# Altium PCB bot_top_4.PcbDoc
Units mil, origin at the board's own origin, x right, y up, seen from the top; angles counter-clockwise.
Board outline 1710 x 2020 mil, 2 copper layers (Top Layer, Bottom Layer); 118 components, 46 nets, 248 pads, 126 vias.
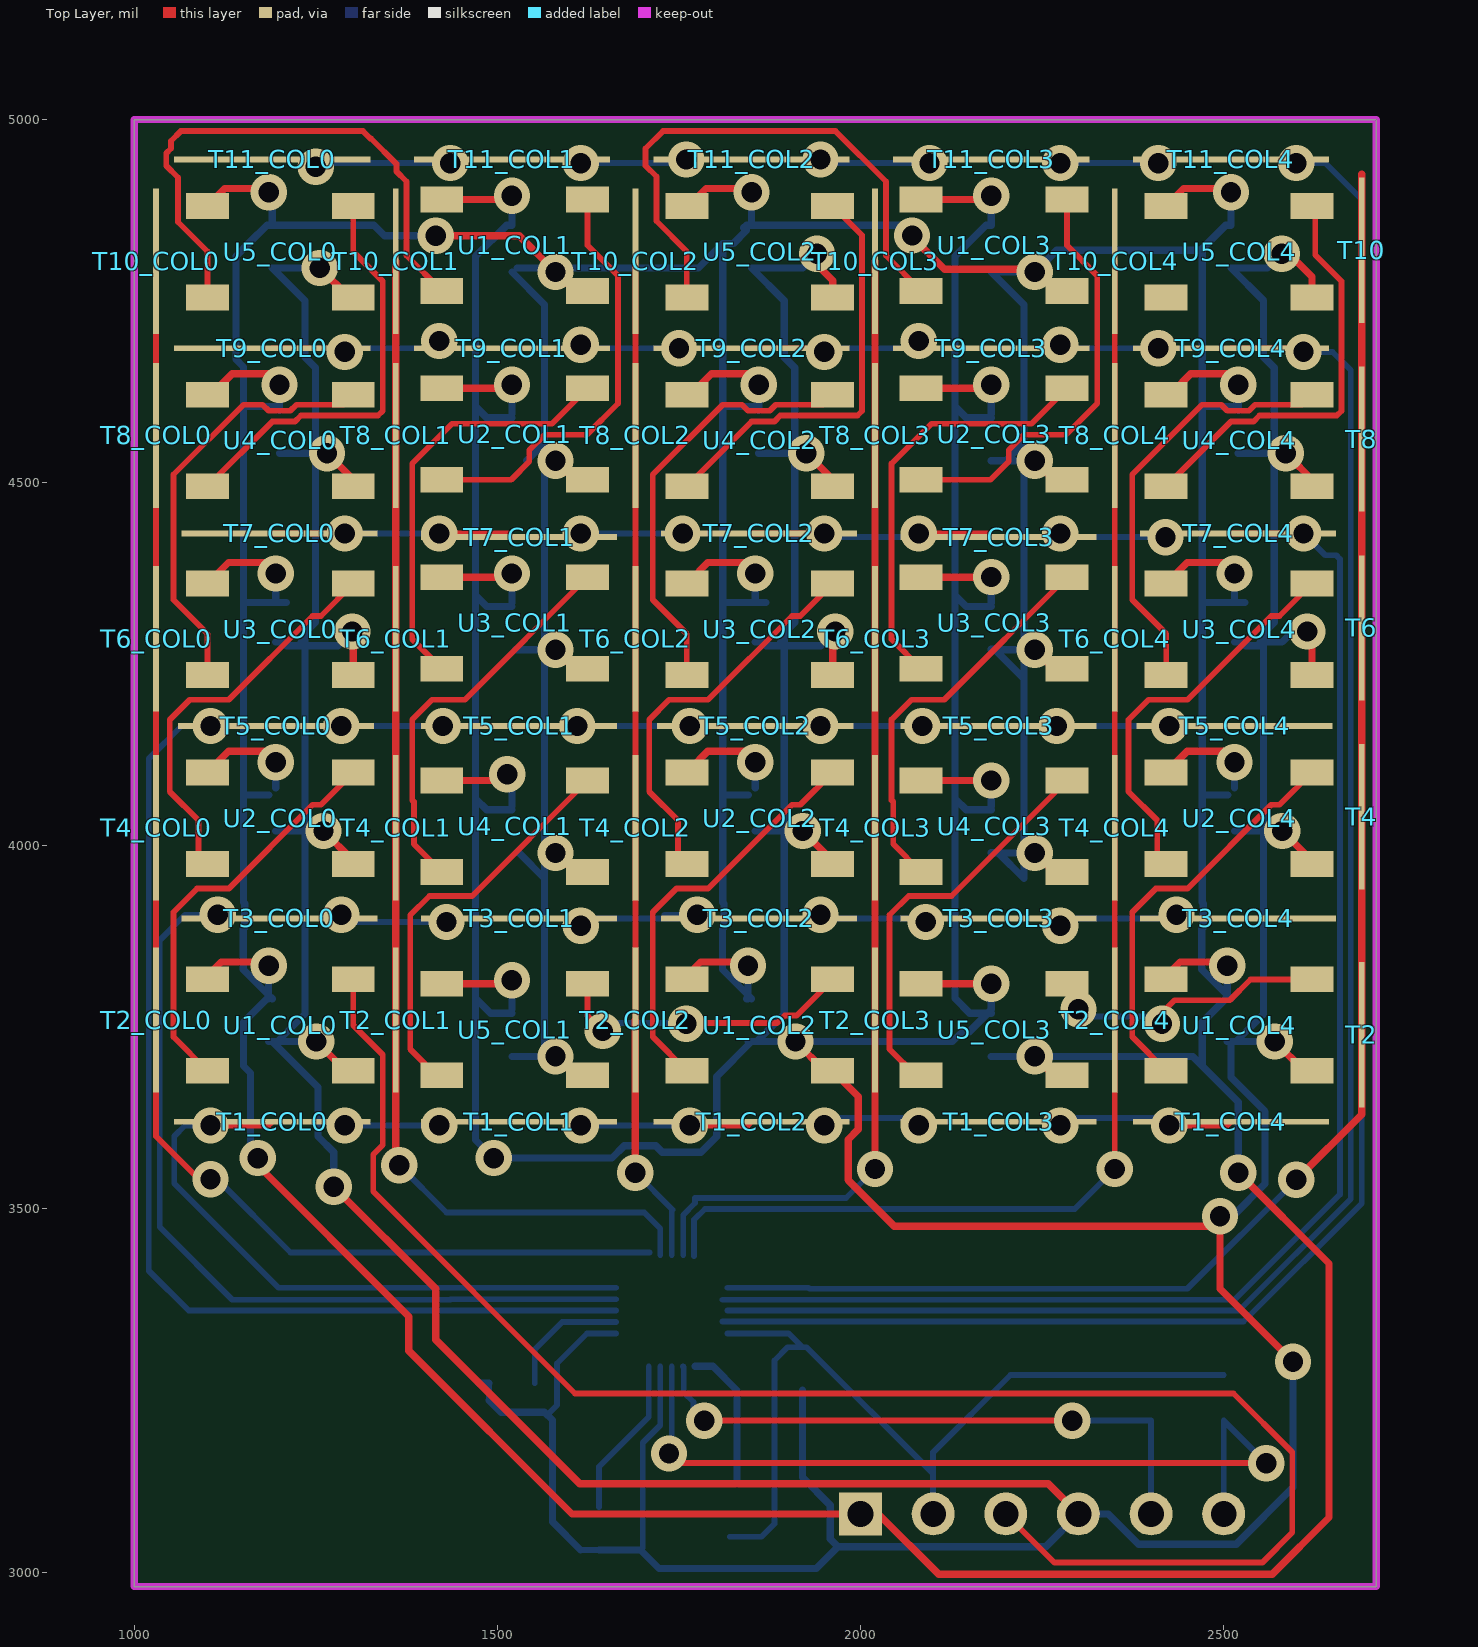
[diagram p0: Top Layer view]
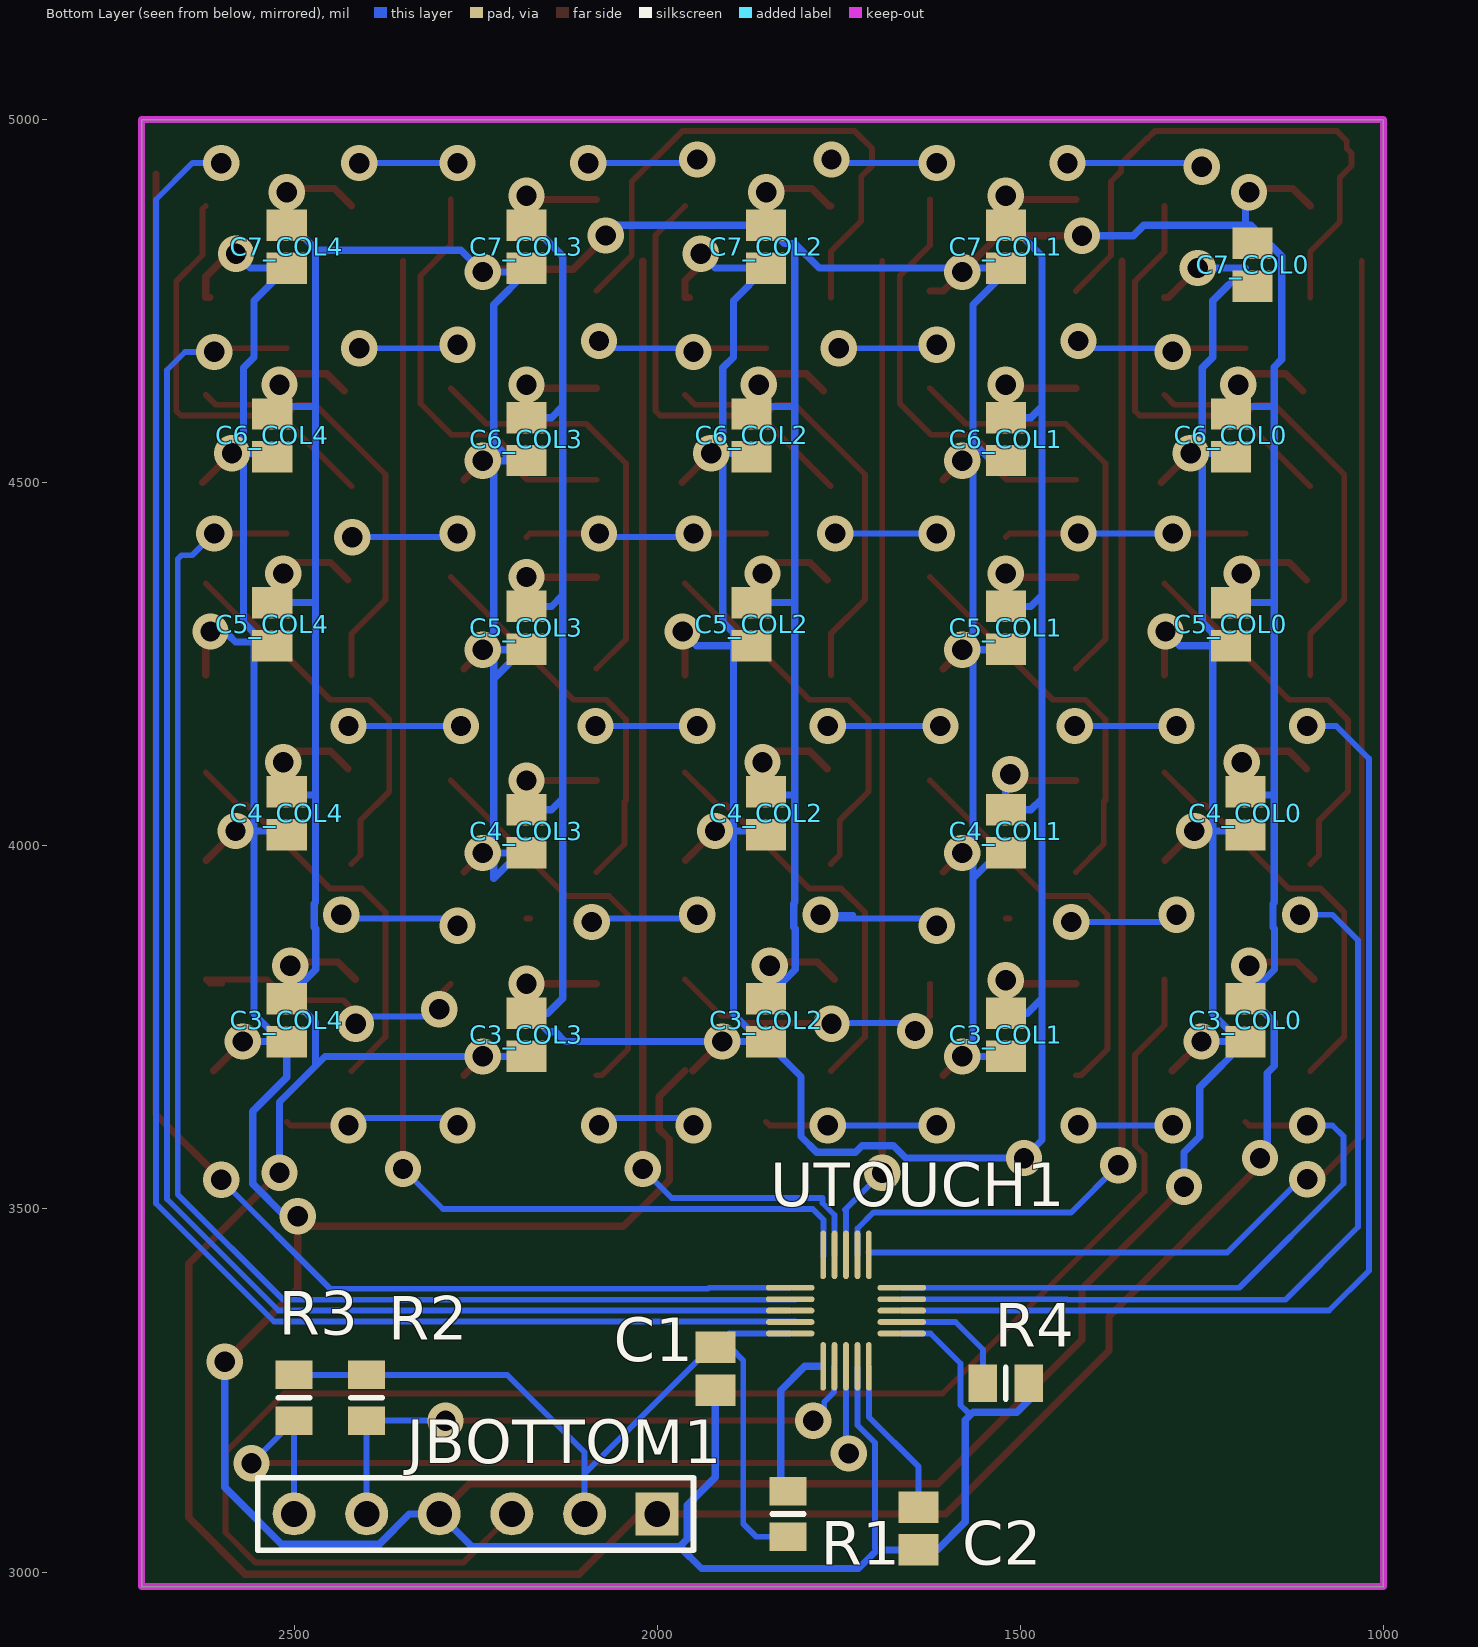
[diagram p1: Bottom Layer view, seen from below]

## Layer stack, top to bottom
Top Layer: signal copper 1.4
Dielectric: dielectric 12.6, FR-4, Dk 4.8
Bottom Layer: signal copper 1.4

## Board outline
2710,2980 1000,2980 1000,5000 2710,5000

## Design rules (kind name [scope] priority, off if disabled: settings)
Clearance [All] p1: gap=7
MinimumSolderMaskSliver [All] p1: minsoldermaskwidth=7
PolygonConnect [All] p1: connectstyle=Relief reliefconductorwidth=10 reliefentries=4 polygonreliefangle="90 Angle"
RoomDefinition COL4 [InComponentClass('COL4')] p1: confinementstyle=ConfineIn formatcopy=TRUE lockcomponents=FALSE outline 2335,3575 2665,3575 2665,5000 2335,5000
RoomDefinition COL3 [InComponentClass('COL3')] p2: confinementstyle=ConfineIn formatcopy=TRUE lockcomponents=FALSE outline 2005,3575 2335,3575 2335,5000 2005,5000
RoomDefinition COL2 [InComponentClass('COL2')] p3: confinementstyle=ConfineIn formatcopy=TRUE lockcomponents=FALSE outline 1675,3575 2005,3575 2005,5000 1675,5000
RoomDefinition COL1 [InComponentClass('COL1')] p4: confinementstyle=ConfineIn formatcopy=TRUE lockcomponents=FALSE outline 1345,3575 1675,3575 1675,5000 1345,5000
RoomDefinition COL0 [InComponentClass('COL0')] p5: confinementstyle=ConfineIn formatcopy=TRUE lockcomponents=FALSE outline 1015,3575 1345,3575 1345,5000 1015,5000
RoutingVias [All] p1: holewidth=28 width=50 viastyle="Through Hole" minholewidth=28 minwidth=50 maxholewidth=28 maxwidth=50
SMDNeckDown [All] p1: percent=200.000
SilkToSilkClearance [All] p1: silktosilkclearance=7
SilkscreenOverComponentPads [All] p1: minsilkscreentomaskgap=7
SolderMaskExpansion [All] p1: expansion=4
Width [All] p1: maxlimit=10 minlimit=7 preferedwidth=8
25 further rules are at their usual default settings.

## Classes and differential pairs
component class BOT-TOP: C1 C2 JBOTTOM1 R1 R2 R3 R4 T2 T4 T6 T8 T10 UTOUCH1
component class COL0: C3_COL0 C4_COL0 C5_COL0 C6_COL0 C7_COL0 T1_COL0 T2_COL0 T3_COL0 T4_COL0 T5_COL0 T6_COL0 T7_COL0 T8_COL0 T9_COL0 T10_COL0 T11_COL0 U1_COL0 U2_COL0 U3_COL0 U4_COL0 U5_COL0
component class COL1: C3_COL1 C4_COL1 C5_COL1 C6_COL1 C7_COL1 T1_COL1 T2_COL1 T3_COL1 T4_COL1 T5_COL1 T6_COL1 T7_COL1 T8_COL1 T9_COL1 T10_COL1 T11_COL1 U1_COL1 U2_COL1 U3_COL1 U4_COL1 U5_COL1
component class COL2: C3_COL2 C4_COL2 C5_COL2 C6_COL2 C7_COL2 T1_COL2 T2_COL2 T3_COL2 T4_COL2 T5_COL2 T6_COL2 T7_COL2 T8_COL2 T9_COL2 T10_COL2 T11_COL2 U1_COL2 U2_COL2 U3_COL2 U4_COL2 U5_COL2
component class COL3: C3_COL3 C4_COL3 C5_COL3 C6_COL3 C7_COL3 T1_COL3 T2_COL3 T3_COL3 T4_COL3 T5_COL3 T6_COL3 T7_COL3 T8_COL3 T9_COL3 T10_COL3 T11_COL3 U1_COL3 U2_COL3 U3_COL3 U4_COL3 U5_COL3
component class COL4: C3_COL4 C4_COL4 C5_COL4 C6_COL4 C7_COL4 T1_COL4 T2_COL4 T3_COL4 T4_COL4 T5_COL4 T6_COL4 T7_COL4 T8_COL4 T9_COL4 T10_COL4 T11_COL4 U1_COL4 U2_COL4 U3_COL4 U4_COL4 U5_COL4
net class T_COL[1..6]: T_COL1 T_COL2 T_COL3 T_COL4 T_COL5 T_COL6
net class T_ROW[1..6]: T_ROW1 T_ROW2 T_ROW3 T_ROW4 T_ROW5 T_ROW6
channel class led_column: COL0 COL1 COL2 COL3 COL4

## Components (designator, comment, footprint, x,y, rotation, side; value= is the part's Value field where it differs from the comment)
C1 "" CAPC2012L 1920,3280 r90 bottom
C2 "" CAPC2012L 1640,3060 r90 bottom
C3_COL0 "" CAPC2012L 1190,3760 r270 bottom (schematic designator C3)
C3_COL1 "" CAPC2012L 1520,3740 r90 bottom (schematic designator C3)
C3_COL2 "" CAPC2012L 1850,3760 r270 bottom (schematic designator C3)
C3_COL3 "" CAPC2012L 2180,3740 r90 bottom (schematic designator C3)
C3_COL4 "" CAPC2012L 2510,3760 r270 bottom (schematic designator C3)
C4_COL0 "" CAPC2012L 1190,4045 r270 bottom (schematic designator C4)
C4_COL1 "" CAPC2012L 1520,4020 r90 bottom (schematic designator C4)
C4_COL2 "" CAPC2012L 1850,4045 r270 bottom (schematic designator C4)
C4_COL3 "" CAPC2012L 2180,4020 r90 bottom (schematic designator C4)
C4_COL4 "" CAPC2012L 2510,4045 r270 bottom (schematic designator C4)
C5_COL0 "" CAPC2012L 1210,4305 r270 bottom (schematic designator C5)
C5_COL1 "" CAPC2012L 1520,4300 r90 bottom (schematic designator C5)
C5_COL2 "" CAPC2012L 1870,4305 r270 bottom (schematic designator C5)
C5_COL3 "" CAPC2012L 2180,4300 r90 bottom (schematic designator C5)
C5_COL4 "" CAPC2012L 2530,4305 r270 bottom (schematic designator C5)
C6_COL0 "" CAPC2012L 1210,4565 r270 bottom (schematic designator C6)
C6_COL1 "" CAPC2012L 1520,4560 r90 bottom (schematic designator C6)
C6_COL2 "" CAPC2012L 1870,4565 r270 bottom (schematic designator C6)
C6_COL3 "" CAPC2012L 2180,4560 r90 bottom (schematic designator C6)
C6_COL4 "" CAPC2012L 2530,4565 r270 bottom (schematic designator C6)
C7_COL0 "" CAPC2012L 1180,4800 r270 bottom (schematic designator C7)
C7_COL1 "" CAPC2012L 1520,4825 r90 bottom (schematic designator C7)
C7_COL2 "" CAPC2012L 1850,4825 r270 bottom (schematic designator C7)
C7_COL3 "" CAPC2012L 2180,4825 r90 bottom (schematic designator C7)
C7_COL4 "" CAPC2012L 2510,4825 r270 bottom (schematic designator C7)
JBOTTOM1 "" HDR1X6 2000,3080 r0 bottom
R1 "" RESC2012L 1820,3080 r90 bottom
R2 "" RESC2012L 2400,3240 r270 bottom
R3 "" RESC2012L 2500,3240 r270 bottom
R4 "" RESC2012L 1520,3260 r0 bottom
T1_COL0 "TouchStrip_Horiz" TouchStrip_Horiz#1 1190,3620 r180 top (schematic designator T1)
T1_COL1 "TouchStrip_Horiz" TouchStrip_Horiz#2 1520,3620 r180 top (schematic designator T1)
T1_COL2 "TouchStrip_Horiz" TouchStrip_Horiz#1 1850,3620 r180 top (schematic designator T1)
T1_COL3 "TouchStrip_Horiz" TouchStrip_Horiz#1 2190,3620 r180 top (schematic designator T1)
T1_COL4 "TouchStrip_Horiz" TouchStrip_Horiz#1 2510,3620 r180 top (schematic designator T1)
T2 "TouchStrip_Vert" TouchStrip_Vert#1 2690,3740 r0 top
T2_COL0 "TouchStrip_Vert" TouchStrip_Vert#1 1030,3760 r180 top (schematic designator T2)
T2_COL1 "TouchStrip_Vert" TouchStrip_Vert#1 1360,3760 r180 top (schematic designator T2)
T2_COL2 "TouchStrip_Vert" TouchStrip_Vert#1 1690,3760 r180 top (schematic designator T2)
T2_COL3 "TouchStrip_Vert" TouchStrip_Vert#1 2020,3760 r180 top (schematic designator T2)
T2_COL4 "TouchStrip_Vert" TouchStrip_Vert#1 2350,3760 r180 top (schematic designator T2)
T3_COL0 "TouchStrip_Horiz" TouchStrip_Horiz#1 1200,3900 r180 top (schematic designator T3)
T3_COL1 "TouchStrip_Horiz" TouchStrip_Horiz#2 1520,3900 r180 top (schematic designator T3)
T3_COL2 "TouchStrip_Horiz" TouchStrip_Horiz#1 1860,3900 r180 top (schematic designator T3)
T3_COL3 "TouchStrip_Horiz" TouchStrip_Horiz#1 2190,3900 r180 top (schematic designator T3)
T3_COL4 "TouchStrip_Horiz" TouchStrip_Horiz#1 2520,3900 r180 top (schematic designator T3)
T4 "TouchStrip_Vert" TouchStrip_Vert#1 2690,4040 r0 top
T4_COL0 "TouchStrip_Vert" TouchStrip_Vert#1 1030,4025 r180 top (schematic designator T4)
T4_COL1 "TouchStrip_Vert" TouchStrip_Vert#1 1360,4025 r180 top (schematic designator T4)
T4_COL2 "TouchStrip_Vert" TouchStrip_Vert#1 1690,4025 r180 top (schematic designator T4)
T4_COL3 "TouchStrip_Vert" TouchStrip_Vert#1 2020,4025 r180 top (schematic designator T4)
T4_COL4 "TouchStrip_Vert" TouchStrip_Vert#1 2350,4025 r180 top (schematic designator T4)
T5_COL0 "TouchStrip_Horiz" TouchStrip_Horiz#1 1195,4165 r180 top (schematic designator T5)
T5_COL1 "TouchStrip_Horiz" TouchStrip_Horiz#2 1520,4165 r180 top (schematic designator T5)
T5_COL2 "TouchStrip_Horiz" TouchStrip_Horiz#1 1855,4165 r180 top (schematic designator T5)
T5_COL3 "TouchStrip_Horiz" TouchStrip_Horiz#1 2190,4165 r180 top (schematic designator T5)
T5_COL4 "TouchStrip_Horiz" TouchStrip_Horiz#1 2515,4165 r180 top (schematic designator T5)
T6 "TouchStrip_Vert" TouchStrip_Vert#1 2690,4300 r0 top
T6_COL0 "TouchStrip_Vert" TouchStrip_Vert#1 1030,4285 r180 top (schematic designator T6)
T6_COL1 "TouchStrip_Vert" TouchStrip_Vert#1 1360,4285 r180 top (schematic designator T6)
T6_COL2 "TouchStrip_Vert" TouchStrip_Vert#1 1690,4285 r180 top (schematic designator T6)
T6_COL3 "TouchStrip_Vert" TouchStrip_Vert#1 2020,4285 r180 top (schematic designator T6)
T6_COL4 "TouchStrip_Vert" TouchStrip_Vert#1 2350,4285 r180 top (schematic designator T6)
T7_COL0 "TouchStrip_Horiz" TouchStrip_Horiz#3 1200,4430 r90 top (schematic designator T7)
T7_COL1 "TouchStrip_Horiz" TouchStrip_Horiz#4 1520,4425 r90 top (schematic designator T7)
T7_COL2 "TouchStrip_Horiz" TouchStrip_Horiz#3 1860,4430 r90 top (schematic designator T7)
T7_COL3 "TouchStrip_Horiz" TouchStrip_Horiz#3 2190,4425 r90 top (schematic designator T7)
T7_COL4 "TouchStrip_Horiz" TouchStrip_Horiz#3 2520,4430 r90 top (schematic designator T7)
T8 "TouchStrip_Vert" TouchStrip_Vert#1 2690,4560 r0 top
T8_COL0 "TouchStrip_Vert" TouchStrip_Vert#2 1030,4565 r90 top (schematic designator T8)
T8_COL1 "TouchStrip_Vert" TouchStrip_Vert#2 1360,4565 r90 top (schematic designator T8)
T8_COL2 "TouchStrip_Vert" TouchStrip_Vert#2 1690,4565 r90 top (schematic designator T8)
T8_COL3 "TouchStrip_Vert" TouchStrip_Vert#2 2020,4565 r90 top (schematic designator T8)
T8_COL4 "TouchStrip_Vert" TouchStrip_Vert#2 2350,4565 r90 top (schematic designator T8)
T9_COL0 "TouchStrip_Horiz" TouchStrip_Horiz#3 1190,4685 r90 top (schematic designator T9)
T9_COL1 "TouchStrip_Horiz" TouchStrip_Horiz#3 1520,4685 r90 top (schematic designator T9)
T9_COL2 "TouchStrip_Horiz" TouchStrip_Horiz#3 1850,4685 r90 top (schematic designator T9)
T9_COL3 "TouchStrip_Horiz" TouchStrip_Horiz#3 2180,4685 r90 top (schematic designator T9)
T9_COL4 "TouchStrip_Horiz" TouchStrip_Horiz#3 2510,4685 r90 top (schematic designator T9)
T10 "TouchStrip_Vert" TouchStrip_Vert#1 2690,4820 r0 top
T10_COL0 "TouchStrip_Vert" TouchStrip_Vert#1 1030,4805 r0 top (schematic designator T10)
T10_COL1 "TouchStrip_Vert" TouchStrip_Vert#1 1360,4805 r0 top (schematic designator T10)
T10_COL2 "TouchStrip_Vert" TouchStrip_Vert#1 1690,4805 r0 top (schematic designator T10)
T10_COL3 "TouchStrip_Vert" TouchStrip_Vert#1 2020,4805 r0 top (schematic designator T10)
T10_COL4 "TouchStrip_Vert" TouchStrip_Vert#1 2350,4805 r0 top (schematic designator T10)
T11_COL0 "TouchStrip_Horiz" TouchStrip_Horiz#3 1190,4945 r90 top (schematic designator T11)
T11_COL1 "TouchStrip_Horiz" TouchStrip_Horiz#3 1520,4945 r90 top (schematic designator T11)
T11_COL2 "TouchStrip_Horiz" TouchStrip_Horiz#3 1850,4945 r90 top (schematic designator T11)
T11_COL3 "TouchStrip_Horiz" TouchStrip_Horiz#3 2180,4945 r90 top (schematic designator T11)
T11_COL4 "TouchStrip_Horiz" TouchStrip_Horiz#3 2510,4945 r90 top (schematic designator T11)
U1_COL0 "WS2812B" WS2812B 550,3380 r0 top (schematic designator U1)
U1_COL1 "WS2812B" WS2812B 2175,5200 r180 top (schematic designator U1)
U1_COL2 "WS2812B" WS2812B 1210,3380 r0 top (schematic designator U1)
U1_COL3 "WS2812B" WS2812B 2835,5200 r180 top (schematic designator U1)
U1_COL4 "WS2812B" WS2812B 1870,3380 r0 top (schematic designator U1)
U2_COL0 "WS2812B" WS2812B 550,3665 r0 top (schematic designator U2)
U2_COL1 "WS2812B" WS2812B 2175,4940 r180 top (schematic designator U2)
U2_COL2 "WS2812B" WS2812B 1210,3665 r0 top (schematic designator U2)
U2_COL3 "WS2812B" WS2812B 2835,4940 r180 top (schematic designator U2)
U2_COL4 "WS2812B" WS2812B 1870,3665 r0 top (schematic designator U2)
U3_COL0 "WS2812B" WS2812B 550,3925 r0 top (schematic designator U3)
U3_COL1 "WS2812B" WS2812B 2175,4680 r180 top (schematic designator U3)
U3_COL2 "WS2812B" WS2812B 1210,3925 r0 top (schematic designator U3)
U3_COL3 "WS2812B" WS2812B 2835,4680 r180 top (schematic designator U3)
U3_COL4 "WS2812B" WS2812B 1870,3925 r0 top (schematic designator U3)
U4_COL0 "WS2812B" WS2812B 550,4185 r0 top (schematic designator U4)
U4_COL1 "WS2812B" WS2812B 2175,4400 r180 top (schematic designator U4)
U4_COL2 "WS2812B" WS2812B 1210,4185 r0 top (schematic designator U4)
U4_COL3 "WS2812B" WS2812B 2835,4400 r180 top (schematic designator U4)
U4_COL4 "WS2812B" WS2812B 1870,4185 r0 top (schematic designator U4)
U5_COL0 "WS2812B" WS2812B 550,4445 r0 top (schematic designator U5)
U5_COL1 "WS2812B" WS2812B 2175,4120 r180 top (schematic designator U5)
U5_COL2 "WS2812B" WS2812B 1210,4445 r0 top (schematic designator U5)
U5_COL3 "WS2812B" WS2812B 2835,4120 r180 top (schematic designator U5)
U5_COL4 "WS2812B" WS2812B 1870,4445 r0 top (schematic designator U5)
UTOUCH1 "MPR121" MPR121 1740,3360 r90 bottom locked

## Footprints (in the part's own frame and the unit in brackets; to place one, negate y for a bottom-side part, rotate by r counter-clockwise, add the part's x,y. Pads: shape width x height; smd on the part's side, far side on the other; paste and mask are expansions set on the pad)
CAPC2012L [mm] "Chip Capacitor, Body 2.0x1.3mm, IPC High Density"
  rect 1.1x1.4 smd: 1(-0.75,0) 2(0.75,0)
  body extent -1.1,-0.72 1.1,0.72, height 1.4
HDR1X6 [mm] "Connector; Header; 6 Position"
  rect 1.5x1.5 hole 0.9: 1(0,0)
  round 1.5 hole 0.9: 2(2.54,0) 3(5.08,0) 4(7.62,0) 5(10.16,0) 6(12.7,0)
  silkscreen extent -1.27,-1.27 13.97,1.27
MPR121 [mm]
  oval 1.7x0.2 smd: 1(-1.95,0.8) 2(-1.95,0.4) 3(-1.95,0) 4(-1.95,-0.4) 5(-1.95,-0.8) 11(1.95,-0.8) 12(1.95,-0.4) 13(1.95,0) 14(1.95,0.4) 15(1.95,0.8)
  oval 0.2x1.7 smd: 6(-0.8,-1.95) 7(-0.4,-1.95) 8(0,-1.95) 9(0.4,-1.95) 10(0.8,-1.95) 16(0.8,1.95) 17(0.4,1.95) 18(0,1.95) 19(-0.4,1.95) 20(-0.8,1.95)
  body extent -1.5,-1.5 1.5,1.5, height 0.6
RESC2012L [mm] "Chip Resistor, Body 2.0x1.3mm, IPC High Density"
  rect 1x1.3 smd: 1(-0.8,0) 2(0.8,0)
  silkscreen extent 0,-0.55 0,0.55, body extent -1.07,-0.7 1.07,0.7, height 2.54
TouchStrip_Horiz#1 [mil]
  rect 270x8 smd: 0(0,0)
TouchStrip_Horiz#2 [mil]
  rect 270x8 smd: 0(-10,0)
TouchStrip_Horiz#3 [mil]
  rect 8x270 smd: 0(0,0)
TouchStrip_Horiz#4 [mil]
  rect 8x270 smd: 0(0,-10)
TouchStrip_Vert#1 [mil]
  rect 8x200 smd: 0(0,0)
TouchStrip_Vert#2 [mil]
  rect 200x8 smd: 0(0,0)
WS2812B [mm]
  rect 1.5x0.9 smd: 1(13.991,11.076) 2(13.991,7.876) 3(19.091,7.876) 4(19.091,11.076)
  body extent 13.99,6.98 18.99,11.98, height 0.6

## Part data
C1 C2 C3_COL0 C3_COL1 C3_COL2 C3_COL3 C3_COL4 C4_COL0 C4_COL1 C4_COL2 C4_COL3 C4_COL4 C5_COL0 C5_COL1 C5_COL2 C5_COL3 C5_COL4 C6_COL0 C6_COL1 C6_COL2 C6_COL3 C6_COL4 C7_COL0 C7_COL1 C7_COL2 C7_COL3 C7_COL4: library part Cap, "Capacitor"
JBOTTOM1: library part "Header 6", "Header, 6-Pin"
R1 R2 R3 R4: library part Res2, "Resistor"
T1_COL0 T1_COL1 T1_COL2 T1_COL3 T1_COL4 T2 T2_COL0 T2_COL1 T2_COL2 T2_COL3 T2_COL4 T3_COL0 T3_COL1 T3_COL2 T3_COL3 T3_COL4 T4 T4_COL0 T4_COL1 T4_COL2 T4_COL3 T4_COL4 T5_COL0 T5_COL1 T5_COL2 T5_COL3 T5_COL4 T6 T6_COL0 T6_COL1 T6_COL2 T6_COL3 T6_COL4 T7_COL0 T7_COL1 T7_COL2 T7_COL3 T7_COL4 T8 T8_COL0 T8_COL1 T8_COL2 T8_COL3 T8_COL4 T9_COL0 T9_COL1 T9_COL2 T9_COL3 T9_COL4 T10 T10_COL0 T10_COL1 T10_COL2 T10_COL3 T10_COL4 T11_COL0 T11_COL1 T11_COL2 T11_COL3 T11_COL4: library part TouchStrip

## Via types
v1: diameter 50, hole 28, Top Layer to Bottom Layer, 126 vias

## Nets (pads, with @x,y where several pads share a name; then routed paths per layer and width w, separated by ;. In a path a pad name is that pad's centre, name@x,y a point inside that pad or via, vN(x,y) a via of type N, cw(c..) or ccw(c..) an arc to the next point about the centre after c; other vN are vias at no path point)
DLED0: U1_COL1.4 U5_COL0.2 | length 777.3
  Top Layer w8: U5_COL0.2 1100.83,4818.26 1060.3,4858.79 1060.3,4920.15 1044,4936.44 1044,4953.56 1050.44,4960 1050.44,4970.44 1064,4984 1315,4984 1325,4974 1326,4974 1360.89,4939.11 1360.89,4928.67 1375,4914.56 1375,4812.63 1423.39,4764.24 U1_COL1.4
DLED1: U1_COL2.4 U5_COL1.2 | length 436.1
  Top Layer w8: U5_COL1.2 1624.17,3765.83 v1(1645,3745) ; v1(1760,3755) 1759.17,3755.83 1884.91,3755.83 1895.56,3766.47 1912.02,3766.47 U1_COL2.4
  Bottom Layer w8: v1(1645,3745) 1655.83,3755.83 1705,3755.83 ; 1690.83,3755.83 1705,3755.83 ; v1(1760,3755) 1759.17,3755.83 1705,3755.83
DLED2: U1_COL3.4 U5_COL2.2 | length 768.5
  Top Layer w8: U5_COL2.2 1760.83,4818.26 1719,4860.09 1719,4921.44 1704,4936.44 1704,4960 1728,4984 1965.56,4984 2035,4914.56 2035,4812.63 U1_COL3.4@2083.39,4764.24
DLED3: U1_COL4.4 U5_COL3.2 | length 451.8
  Top Layer w8: U5_COL3.2 2310,3784.1 2310,3775 v1(2300,3775) ; v1(2415,3755) 2415,3760 2410,3765 2432.35,3787.35 2508.26,3787.35 2536.98,3816.06 U1_COL4.4 2615.47,3809.92 U1_COL4.4@2599.01,3809.92
  Bottom Layer w8: v1(2300,3775) 2310,3775 2320,3765 2410,3765 2415,3760 v1(2415,3755)
GND: C1.1 C2.1 C3_COL0.2 C3_COL1.2 C3_COL2.2 C3_COL3.2 C3_COL4.2 C4_COL0.2 C4_COL1.2 C4_COL2.2 C4_COL3.2 C4_COL4.2 C5_COL0.2 C5_COL1.2 C5_COL2.2 C5_COL3.2 C5_COL4.2 C6_COL0.2 C6_COL1.2 C6_COL2.2 C6_COL3.2 C6_COL4.2 C7_COL0.2 C7_COL1.2 C7_COL2.2 C7_COL3.2 C7_COL4.2 JBOTTOM1.4 R4.1 U1_COL0.3 U1_COL1.3 U1_COL2.3 U1_COL3.3 U1_COL4.3 U2_COL0.3 U2_COL1.3 U2_COL2.3 U2_COL3.3 U2_COL4.3 U3_COL0.3 U3_COL1.3 U3_COL2.3 U3_COL3.3 U3_COL4.3 U4_COL0.3 U4_COL1.3 U4_COL2.3 U4_COL3.3 U4_COL4.3 U5_COL0.3 U5_COL1.3 U5_COL2.3 U5_COL3.3 U5_COL4.3 UTOUCH1.4 UTOUCH1.6 | length 15769.8
  Top Layer w10: v1(1250.47,3730.47) U1_COL0.3@1290.87,3690.08 ; v1(1255.47,4795.47) 1295.87,4755.08 U5_COL0.3 ; v1(1260.47,4020.47) U2_COL0.3@1300.87,3980.08 ; v1(1265.47,4540.47) U4_COL0.3@1305.87,4500.08 ; v1(1274.67,3530.33) 1415,3390 1415,3320 1613.47,3121.53 2258.47,3121.53 JBOTTOM1.4 ; U3_COL0.3 v1@1301.61,4293.39 ; U5_COL1.3 1504.92,3809.92 1520,3825 v1(1520,3815) ; U4_COL1.3 1504.92,4089.92 v1(1513.68,4098.68) ; U3_COL1.3 1504.92,4369.92 1520,4385 v1(1520,4375) ; U2_COL1.3 1504.92,4629.92 1520,4645 v1(1520,4635) ; U1_COL1.3 1504.92,4889.92 1520,4905 v1(1520,4895) ; v1(1910.47,3730.47) U1_COL2.3@1950.87,3690.08 ; v1(1920.47,4020.47) U2_COL2.3@1960.87,3980.08 ; v1(1925.47,4540.47) U4_COL2.3@1965.87,4500.08 ; v1@1930,4810 1935,4810 v1(1940,4815) ; v1@1940,4800 1961.61,4778.39 U5_COL2.3 U5_COL2.3@1955.87,4755.08 ; U1_COL2.3 1997,3654.69 1997,3609.67 1983,3595.67 1983,3539.67 2046.36,3476.31 v1@2495,3476.31 ; U3_COL2.3 1961.61,4291.61 v1(1965,4295) ; U5_COL3.3 2164.92,3809.92 2180,3825 v1(2180,3810) ; U4_COL3.3 2164.92,4089.92 2180,4105 v1(2180,4090) ; U3_COL3.3 2164.92,4369.92 2180,4385 v1@2180,4380 ; U2_COL3.3 2164.92,4629.92 2180,4645 v1(2180,4635) ; U1_COL3.3 2164.92,4889.92 2180,4905 v1(2180,4895) ; v1(2495,3490) v1@2495,3476.31 ; v1(2570.47,3730.47) U1_COL4.3@2610.87,3690.08 ; v1(2580.47,4020.47) U2_COL4.3@2620.87,3980.08 ; v1@2585,4820 2621.61,4783.39 U5_COL4.3 U5_COL4.3@2615.87,4755.08 ; v1(2585.47,4540.47) U4_COL4.3@2625.87,4500.08 ; v1(2595.5,3289.5) 2495,3390 v1@2495,3476.31 ; v1(2615,4295) 2621.61,4288.39 U3_COL4.3
  Bottom Layer w8: R4.1@1488.5,3236.5 R4.1 ; 1572.33,3220 1582.18,3229.85 1582.18,3240 ; 1582.18,3247.46 1582.18,3240 ; C2.1@1614.53,3030.47 C2.1 ; UTOUCH1.6 1623.5,3328.5 1582.18,3287.18 1582.18,3240 ; 1697.2,3030.47 1700.21,3033.48 1700.21,3178.09 1724.25,3202.14 UTOUCH1.4
  Bottom Layer w10: C3_COL0.2@1185,3730.47 C3_COL0.2 ; C4_COL0.2@1195,4020.47 1235,4020.47 ; C5_COL0.2@1195,4280.47 C5_COL0.2@1210,4280.47 ; C6_COL0.2@1200,4540.47 v1(1265.47,4540.47) ; C5_COL0.2@1230,4275.47 C5_COL0.2 1280.47,4275.47 v1(1300,4295) ; C5_COL0.2@1230,4280.47 C5_COL0.2@1235,4280.47 ; v1(1250.47,3730.47) C3_COL0.2@1197.13,3730.47 ; v1(1255.47,4795.47) 1190,4795.47 1235,4750.47 1235,4672.67 1249.56,4658.11 1249.56,4307.9 1235,4293.34 C5_COL0.2@1235,4280.47 ; v1(1260.47,4020.47) 1235,4020.47 ; v1(1274.67,3530.33) 1274.67,3578 1253,3599.67 1253,3667.47 C3_COL0.2 ; R4.1@1475,3260 R4.1 ; R4.1@1488.5,3236.5 1505,3220 1565,3220 1575.74,3209.26 1575.74,3069.26 C2.1@1614.53,3030.47 ; v1(1513.68,4098.68) 1520,4105 C4_COL1.2@1520,4054.53 ; C3_COL1.2 1490.47,3769.53 1470,3790 ; C3_COL1.2@1520,3774.53 1520,3825 v1(1520,3815) ; C4_COL1.2 1485.47,4049.53 1470,4065 ; C5_COL1.2 1485.47,4329.53 1470,4345 ; C5_COL1.2@1520,4334.53 1520,4385 v1(1520,4375) ; C6_COL1.2 1485.47,4589.53 1470,4605 ; C6_COL1.2@1520,4594.53 1520,4645 v1(1520,4635) ; v1(1520,4895) 1520,4905 C7_COL1.2 1512.87,4854.53 1470,4811.65 1470,4605 ; C2.1 1697.2,3030.47 1722.67,3005 1938.97,3005 1968.97,3035 ; C3_COL2.2@1845,3730.47 C3_COL2.2 ; C4_COL2.2@1855,4020.47 1895,4020.47 ; C5_COL2.2@1855,4280.47 C5_COL2.2@1870,4280.47 ; C6_COL2.2@1860,4540.47 v1@1909.56,4540.47 ; C5_COL2.2@1890,4275.47 C5_COL2.2 1945.47,4275.47 v1(1965,4295) ; C5_COL2.2@1890,4280.47 C5_COL2.2@1895,4280.47 ; C1.1 1920,3130.47 1958.47,3092 1958.47,3045.5 1968.97,3035 ; v1(1920.47,4020.47) 1895,4020.47 ; v1(1925.47,4540.47) v1@1909.56,4540.47 ; v1@1930,4810 v1@1935,4810 ; v1(1940,4815) v1@1935,4810 ; C3_COL3.2 C3_COL3.2@2175,3769.53 ; v1(2180,3810) 2180,3825 2180,3774.53 C3_COL3.2@2175,3769.53 ; C4_COL3.2 2145.47,4049.53 2130,4065 ; C4_COL3.2@2180,4054.53 2180,4105 v1(2180,4090) ; C5_COL3.2 2145.47,4329.53 2130,4345 ; C5_COL3.2@2180,4334.53 2180,4385 v1@2180,4380 ; C6_COL3.2 2145.47,4589.53 2130,4605 ; C6_COL3.2@2180,4594.53 2180,4645 v1(2180,4635) ; v1(2180,4895) 2180,4905 C7_COL3.2 2172.87,4854.53 2130,4811.65 2130,4605 ; C3_COL4.2@2505,3730.47 C3_COL4.2 ; v1@2512.33,3490 2557,3534.67 2557,3634.3 2510,3681.3 C3_COL4.2 ; C4_COL4.2@2515,4020.47 2555,4020.47 ; C5_COL4.2@2515,4280.47 C5_COL4.2@2530,4280.47 ; C6_COL4.2@2520,4540.47 v1(2585.47,4540.47) ; C5_COL4.2 C5_COL4.2@2550,4275.47 ; C5_COL4.2@2550,4280.47 C5_COL4.2@2555,4280.47 ; v1(2570.47,3730.47) C3_COL4.2@2517.13,3730.47 ; v1(2580,4815) 2560.47,4795.47 C7_COL4.2 2555,4750.47 2555,4672.67 2569.56,4658.11 2569.56,4307.9 2555,4293.34 C5_COL4.2@2555,4280.47 ; v1(2580.47,4020.47) 2555,4020.47 ; 2590,4290 2580.47,4280.47 C5_COL4.2@2555,4280.47 ; v1(2595.5,3289.5) 2595.5,3116.78 2517.2,3038.47 2382.8,3038.47 2341.27,3080 JBOTTOM1.4 2255,3035 1968.97,3035 ; C3_COL0.2 C3_COL0.2@1197.13,3730.47 ; C3_COL0.2@1197.13,3730.47 1235,3768.34 1235,4020.47 ; 1235,4020.47 C5_COL0.2@1235,4280.47 ; 1470,3790 1470,4065 ; 1470,3790 1470,3595 v1(1495,3570) 1657.67,3570 1674.67,3587 1717.93,3587 1726.93,3578 1780.33,3578 1802,3599.67 1802,3682.47 C3_COL2.2 ; 1470,4065 1470,4345 ; 1470,4345 1470,4605 ; C3_COL2.2 C3_COL2.2@1857.13,3730.47 ; C3_COL2.2@1857.13,3730.47 1895,3768.34 1895,4020.47 ; C3_COL2.2@1857.13,3730.47 v1(1910.47,3730.47) 2126.79,3730.47 2140.44,3744.13 2149.6,3744.13 C3_COL3.2@2175,3769.53 ; 1895,4020.47 C5_COL2.2@1895,4280.47 ; C5_COL2.2@1895,4280.47 1895,4293.34 1909.56,4307.9 v1@1909.56,4540.47 ; v1@1909.56,4540.47 1909.56,4658.11 1895,4672.67 1895,4750.47 C7_COL2.2 1920.47,4795.47 v1@1935,4810 ; 2130,4065 2130,4345 ; 2130,4065 2130,3790 2150.47,3769.53 C3_COL3.2@2175,3769.53 ; 2130,4345 2130,4605 ; C3_COL4.2 C3_COL4.2@2517.13,3730.47 ; C3_COL4.2@2517.13,3730.47 2555,3768.34 2555,4020.47 ; 2555,4020.47 C5_COL4.2@2555,4280.47
  other v1: 2180,4370
LED: JBOTTOM1.3 U1_COL0.4 | length 2278.4
  Top Layer w8: U1_COL0.4 1301.61,3752.88 1342.14,3712.35 1342.14,3588.05 1329,3574.91 1329,3524 1607,3246 2513.42,3246 2594.5,3164.91 2594.5,3054.5 2553,3013 2267,3013 JBOTTOM1.3
NetC2_2: C2.2 UTOUCH1.5 | length 222.1
  Bottom Layer w8: C2.2 1640,3145 1708.5,3213.5 UTOUCH1.5
NetR1_2: R1.2 UTOUCH1.1 | length 199.7
  Bottom Layer w10: UTOUCH1.1@1772.56,3283.23 1796.77,3283.23 1830,3250 R1.2@1830,3121.5
NetR4_2: R4.2 UTOUCH1.7 | length 173.9
  Bottom Layer w8: R4.2 1551.5,3306.5 1589.25,3344.25 UTOUCH1.7
NetU1_COL0_2: U1_COL0.2 U2_COL0.4 | length 565.2
  Top Layer w8: U1_COL0.2 1054,3736.9 1054,3908.56 1086.44,3941 1130.09,3941 1245.56,4056.47 1257.02,4056.47 U2_COL0.4
NetU1_COL1_2: U1_COL1.2 U2_COL1.4 | length 593.7
  Top Layer w8: U2_COL1.4 1518.94,4503.94 1544,4529 1544,4544.91 1565.09,4566 1623.05,4566 1666,4608.95 1666,4784.91 1624.17,4826.74 U1_COL1.2
NetU1_COL2_2: U1_COL2.2 U2_COL2.4 | length 565.2
  Top Layer w8: U1_COL2.2 1714,3736.9 1714,3908.56 1746.44,3941 1790.09,3941 1905.56,4056.47 1917.02,4056.47 U2_COL2.4
NetU1_COL3_2: U1_COL3.2 U2_COL3.4 | length 593.7
  Top Layer w8: U2_COL3.4 2178.94,4503.94 2204,4529 2204,4544.91 2225.09,4566 2283.05,4566 2326,4608.95 2326,4784.91 2284.17,4826.74 U1_COL3.2
NetU1_COL4_2: U1_COL4.2 U2_COL4.4 | length 565.2
  Top Layer w8: U1_COL4.2 2374,3736.9 2374,3908.56 2406.44,3941 2450.09,3941 2565.56,4056.47 2577.02,4056.47 U2_COL4.4
NetU2_COL0_2: U2_COL0.2 U3_COL0.4 | length 550.2
  Top Layer w8: U2_COL0.2 1088.54,3987.36 1088.54,4035 1049,4074.54 1049,4173.56 1076.44,4201 1130.09,4201 1245.56,4316.47 1257.02,4316.47 U3_COL0.4
NetU2_COL1_2: U2_COL1.2 U3_COL1.4 | length 583.3
  Top Layer w8: U3_COL1.4 1382.86,4284.47 1382.86,4526.21 1437.65,4581 1575.25,4581 U2_COL1.2
NetU2_COL2_2: U2_COL2.2 U3_COL2.4 | length 550.2
  Top Layer w8: U2_COL2.2 1748.54,3987.36 1748.54,4035 1709,4074.54 1709,4173.56 1736.44,4201 1790.09,4201 1905.56,4316.47 1917.02,4316.47 U3_COL2.4
NetU2_COL3_2: U2_COL3.2 U3_COL3.4 | length 583.3
  Top Layer w8: U3_COL3.4 2042.86,4284.47 2042.86,4526.21 2097.65,4581 2235.25,4581 U2_COL3.2
NetU2_COL4_2: U2_COL4.2 U3_COL4.4 | length 550.2
  Top Layer w8: U2_COL4.2 2408.54,3987.36 2408.54,4035 2369,4074.54 2369,4173.56 2396.44,4201 2450.09,4201 2565.56,4316.47 2577.02,4316.47 U3_COL4.4
NetU3_COL0_2: U3_COL0.2 U4_COL0.4 | length 595.5
  Top Layer w8: U3_COL0.2 1100.83,4291.82 1054,4338.65 1054,4511.05 1150.29,4607.35 1176.74,4607.35 1185.09,4599 1214.91,4599 1223.26,4607.35 1287.9,4607.35 U4_COL0.4
NetU3_COL1_2: U3_COL1.2 U4_COL1.4 | length 549.2
  Top Layer w8: U4_COL1.4 1385,4002.32 1385,4060.61 1382.86,4062.75 1382.86,4173.77 1410.09,4201 1455.25,4201 U3_COL1.2
NetU3_COL2_2: U3_COL2.2 U4_COL2.4 | length 595.5
  Top Layer w8: U3_COL2.2 1760.83,4291.82 1714,4338.65 1714,4511.05 1810.29,4607.35 1836.74,4607.35 1845.09,4599 1874.91,4599 1883.26,4607.35 1947.9,4607.35 U4_COL2.4
NetU3_COL3_2: U3_COL3.2 U4_COL3.4 | length 549.2
  Top Layer w8: U4_COL3.4 2045,4002.32 2045,4060.61 2042.86,4062.75 2042.86,4173.77 2070.09,4201 2115.25,4201 U3_COL3.2
NetU3_COL4_2: U3_COL4.2 U4_COL4.4 | length 595.5
  Top Layer w8: U3_COL4.2 2420.83,4291.82 2374,4338.65 2374,4511.05 2470.29,4607.35 2476.91,4607.35 2490.13,4607.35 2496.74,4607.35 2505.09,4599 2534.91,4599 2543.26,4607.35 2607.9,4607.35 U4_COL4.4
NetU4_COL0_2: U4_COL0.2 U5_COL0.4 | length 583.2
  Top Layer w8: U4_COL0.2@1100.99,4495.08 1189.91,4584 1221.12,4584 1229.47,4592.35 1335.7,4592.35 1342.14,4598.79 1342.14,4777.35 1301.61,4817.88 U5_COL0.4
NetU4_COL1_2: U4_COL1.2 U5_COL1.4 | length 563.8
  Top Layer w8: U5_COL1.4 1416.06,3683.94 1380,3720 1380,3904.56 1406.44,3931 1465.25,3931 U4_COL1.2
NetU4_COL2_2: U4_COL2.2 U5_COL2.4 | length 583.2
  Top Layer w8: U4_COL2.2@1760.99,4495.08 1849.91,4584 1881.12,4584 1889.47,4592.35 1995.7,4592.35 2002.14,4598.79 2002.14,4840.54 U5_COL2.4
NetU4_COL3_2: U4_COL3.2 U5_COL3.4 | length 563.8
  Top Layer w8: U5_COL3.4 2076.06,3683.94 2040,3720 2040,3904.56 2066.44,3931 2125.25,3931 U4_COL3.2
NetU4_COL4_2: U4_COL4.2 U5_COL4.4 | length 583.2
  Top Layer w8: U4_COL4.2@2420.99,4495.08 2509.91,4584 2541.12,4584 2549.47,4592.35 2655.7,4592.35 2662.14,4598.79 2662.14,4777.35 2626,4813.49 2626,4876.68 U5_COL4.4
NetU5_COL4_2: U5_COL4.2
SCL: JBOTTOM1.5 R2.2 UTOUCH1.2 | length 869.5
  Top Layer w8: v1(1785,3208.5) 1781.5,3208.5 1780,3210 1770,3210 1771.5,3208.5 v1(2291.5,3208.5)
  Bottom Layer w8: UTOUCH1.2 1756.56,3282.42 1756.56,3247.51 1770,3234.07 1770,3210 1780,3210 1781.5,3208.5 v1(1785,3208.5) ; v1(2291.5,3208.5) R2.2 JBOTTOM1.5
SDA: JBOTTOM1.6 R3.2 UTOUCH1.3 | length 1142
  Top Layer w8: v1@1749.39,3150 v1(2558.5,3150)
  Bottom Layer w8: v1(1736.21,3163.18) 1740,3166.97 UTOUCH1.3 ; JBOTTOM1.6 R3.2 v1(2558.5,3150)
T_COL1: T2.0 T4.0 T6.0 T8.0 T10.0 UTOUCH1.16 | length 2363.3
  Top Layer w10: v1(2600,3540) 2690,3630 T2.0 ; T2.0@2690,3645 T2.0 ; 2690,4925 T2.0
  Bottom Layer w8: UTOUCH1.16 1928.5,3391.5 1930,3390 2450,3390 v1(2600,3540)
T_COL2: T2_COL0.0 T4_COL0.0 T6_COL0.0 T8_COL0.0 T10_COL0.0 UTOUCH1.11 | length 1928.8
  Top Layer w8: T10_COL0.0 T8_COL0.0 T6_COL0.0 T4_COL0.0 T2_COL0.0 1030,3600 v1@1085,3545
  Bottom Layer w8: v1(1105,3540.75) 1114.25,3540.75 1215,3440 UTOUCH1.11@1709.32,3440
T_COL3: T2_COL1.0 T4_COL1.0 T6_COL1.0 T8_COL1.0 T10_COL1.0 UTOUCH1.12 | length 1678.7
  Top Layer w10: T10_COL1.0 T8_COL1.0 T6_COL1.0 T4_COL1.0 T2_COL1.0 1360,3565 v1(1365,3560)
  Bottom Layer w8: v1(1365,3560) 1430,3495 1702.34,3495 1724.32,3473.03 UTOUCH1.12
T_COL4: T2_COL2.0 T4_COL2.0 T6_COL2.0 T8_COL2.0 T10_COL2.0 UTOUCH1.13 | length 1402.3
  Top Layer w8: T2_COL2.0 T4_COL2.0 T6_COL2.0 T8_COL2.0 T10_COL2.0
  Top Layer w10: v1@1690,3537.63 v1(1690,3550) T2_COL2.0
  Bottom Layer w8: v1(1690,3550) 1741.25,3498.75 1740,3497.5 UTOUCH1.13
T_COL5: T2_COL3.0 T4_COL3.0 T6_COL3.0 T8_COL3.0 T10_COL3.0 UTOUCH1.14 | length 1599.4
  Top Layer w10: v1(2020,3555) T2_COL3.0 T4_COL3.0 T6_COL3.0 T8_COL3.0 T10_COL3.0
  Bottom Layer w8: UTOUCH1.14@1755.81,3436.77 1755.81,3491.65 1772.25,3508.09 1772.25,3515 1980,3515 v1(2020,3555)
T_COL6: T2_COL4.0 T4_COL4.0 T6_COL4.0 T8_COL4.0 T10_COL4.0 UTOUCH1.15 | length 1908.2
  Top Layer w8: v1(2350,3555) T2_COL4.0 T4_COL4.0 T6_COL4.0 T8_COL4.0 T10_COL4.0
  Bottom Layer w8: UTOUCH1.15@1770.81,3435 1770.81,3485 1785.81,3500 2295,3500 v1(2350,3555)
T_ROW1: T1_COL0.0 T1_COL1.0 T1_COL2.0 T1_COL3.0 T1_COL4.0 UTOUCH1.10 | length 1600.1
  Top Layer w8: v1(1105,3615) 1185,3615 T1_COL0.0 ; v1(1765,3615) 1845,3615 T1_COL2.0 ; v1(2425,3615) 2505,3615 T1_COL4.0
  Bottom Layer w8: v1(1105,3615) 1070,3615 1055,3600 1055,3535 1198.5,3391.5 UTOUCH1.10 ; v1(1290,3615) v1(1420,3615) ; v1(1615,3615) 1735,3615 ; 1730,3615 v1(1765,3615) ; v1@1950,3625 v1@2080,3625 ; v1@2280,3625 v1@2415,3625
  other v1: 1950,3615 2080,3615 2275,3615
T_ROW2: T3_COL0.0 T3_COL1.0 T3_COL2.0 T3_COL3.0 T3_COL4.0 UTOUCH1.9 | length 1773.4
  Top Layer w8: T3_COL1.0@1515,3900 T3_COL1.0@1520,3900 ; T3_COL3.0@2175,3900 T3_COL3.0@2180,3900
  Bottom Layer w8: v1(1115,3905) 1070,3905 1035,3870 1035,3475 1135,3375 1435,3375 ; v1@1295,3895 v1(1430,3895) ; 1435.75,3375.75 UTOUCH1.9 ; v1@1625,3900 1750,3900 ; 1730,3905 v1(1775,3905) ; v1@1940,3900 v1@2090,3900 ; v1@2270,3900 v1@2420,3900
  other v1: 1615,3890 2275,3890 2090,3895 1285,3905 1945,3905 2435,3905
T_ROW3: T5_COL0.0 T5_COL1.0 T5_COL2.0 T5_COL3.0 T5_COL4.0 UTOUCH1.8 | length 2134.6
  Bottom Layer w8: v1(1105,4165) 1065,4165 1020,4120 1020,3415 1075,3360 UTOUCH1.8 ; v1(1285,4165) v1(1425,4165) ; v1(1610,4165) v1@1755,4165 ; 1725,4165 v1(1765,4165) ; v1(1945,4165) v1@2090,4165 ; v1@2275,4165 v1(2425,4165) 2385,4165
  other v1: 2085,4165 2270,4165
T_ROW4: T7_COL0.0 T7_COL1.0 T7_COL2.0 T7_COL3.0 T7_COL4.0 UTOUCH1.17 | length 2997.8
  Top Layer w8: T7_COL0.0@1190,4430 v1(1290,4430) ; v1(1420,4430) 1515,4430 T7_COL1.0@1520,4425 ; T7_COL2.0@1850,4430 v1(1950,4430) ; v1(2080,4430) 2175,4430 T7_COL3.0@2180,4425 ; T7_COL4.0@2510,4430 v1(2610,4430)
  Bottom Layer w8: v1(1290,4430) 1415,4430 v1@1420,4425 ; v1(1615,4430) 1680,4430 ; UTOUCH1.17@1810,3375 2515,3375 2660,3520 2660,4395 2655,4400 2640,4400 v1(2610,4430) ; v1@1945,4425 v1@2090,4425 ; v1@2075,4430 v1@2080,4425 ; v1@2275,4425 v1(2420,4425) ; 1680,4430 v1(1755,4430) 1680,4430
  other v1: 2275,4430
T_ROW5: T9_COL0.0 T9_COL1.0 T9_COL2.0 T9_COL3.0 T9_COL4.0 UTOUCH1.18 | length 3155.9
  Top Layer w8: T9_COL0.0 1285,4685 1285,4675 v1(1290,4680) ; T9_COL2.0 1945,4685 1945,4675 v1(1950,4680) ; T9_COL4.0 2605,4685 2605,4675 v1(2610,4680)
  Bottom Layer w8: v1(1290,4680) 1285,4675 1285,4685 v1@1420,4685 ; v1(1615,4690) 1615,4685 1705,4685 ; UTOUCH1.18 2521.21,3360 2675,3513.79 2675,4655 2650,4680 v1(2610,4680) 2605,4675 v1@2605,4685 ; v1@1945,4685 1945,4675 v1(1950,4680) ; v1@1950,4685 v1@2080,4685 ; v1@2280,4685 2365,4685 ; v1(2410,4685) 2365,4685 ; v1@2415,4685 2365,4685 ; 1705,4685 v1(1750,4685) 1705,4685
  other v1: 2275,4690 1420,4695 2080,4695
T_ROW6: T11_COL0.0 T11_COL1.0 T11_COL2.0 T11_COL3.0 T11_COL4.0 UTOUCH1.19 | length 3473.2
  Top Layer w8: v1(1250,4935) v1@1250,4940 ; v1@1940,4940 1945,4935 v1(1945,4945)
  Bottom Layer w8: v1(1250,4935) 1250,4940 1280,4940 v1(1435,4940) ; v1(1615,4940) 1715,4940 ; v1@1755,4940 1715,4940 ; v1(1760,4945) 1760,4940 1755,4935 1755,4950 1755,4945 1765,4935 1765,4945 1765,4943.7 1756.3,4935 1751.3,4940 1715,4940 ; UTOUCH1.19@1810,3345 2527.43,3345 2690,3507.57 ; v1@1945,4940 v1(2095,4940) ; v1(2275,4940) 2355,4940 ; v1(2600,4940) 2640,4940 2690,4890 2690,3507.57 ; 2690,3735 2690,3507.57 ; 2355,4940 v1(2410,4940) 2355,4940
V3_3: C1.2 JBOTTOM1.2 R1.1 R2.1 R3.1 UTOUCH1.20 | length 1272.8
  Bottom Layer w8: R1.1 1863.5,3048.5 1881.44,3066.44 1881.44,3291.44 1899.53,3309.53 C1.2 ; 1851.5,3328.5 UTOUCH1.20 1901.02,3328.5 C1.2 ; C1.2@1914.29,3309.53 C1.2 ; JBOTTOM1.2 2100,3135.24 ; R3.1 R2.1 2206.5,3271.5 2100,3165 2100,3135.24 ; C1.2 1925.71,3309.53 2100,3135.24
V5: C3_COL0.1 C3_COL1.1 C3_COL2.1 C3_COL3.1 C3_COL4.1 C4_COL0.1 C4_COL1.1 C4_COL2.1 C4_COL3.1 C4_COL4.1 C5_COL0.1 C5_COL1.1 C5_COL2.1 C5_COL3.1 C5_COL4.1 C6_COL0.1 C6_COL1.1 C6_COL2.1 C6_COL3.1 C6_COL4.1 C7_COL0.1 C7_COL1.1 C7_COL2.1 C7_COL3.1 C7_COL4.1 JBOTTOM1.1 U1_COL0.1 U1_COL1.1 U1_COL2.1 U1_COL3.1 U1_COL4.1 U2_COL0.1 U2_COL1.1 U2_COL2.1 U2_COL3.1 U2_COL4.1 U3_COL0.1 U3_COL1.1 U3_COL2.1 U3_COL3.1 U3_COL4.1 U4_COL0.1 U4_COL1.1 U4_COL2.1 U4_COL3.1 U4_COL4.1 U5_COL0.1 U5_COL1.1 U5_COL2.1 U5_COL3.1 U5_COL4.1 | length 13453.1
  Top Layer w10: U1_COL0.1@1095.83,3816.06 1119.76,3840 v1@1185,3840 ; U5_COL0.1 1124.76,4905 1190,4905 v1(1185,4900) ; U2_COL0.1@1105.83,4106.06 1129.76,4130 v1@1195,4130 ; U3_COL0.1@1105.83,4366.06 1129.76,4390 v1@1195,4390 ; U4_COL0.1@1110.83,4626.06 1134.76,4650 v1@1200,4650 ; v1(1170,3570) 1160,3570 1378,3352 1378,3304.67 1602.67,3080 JBOTTOM1.1 2024.53,3080 2107.53,2997 2567,2997 2645,3075 2645,3425 v1(2520,3550) ; v1(1415,4840) 1530,4840 v1(1580,4790) 1606.06,4763.94 U1_COL1.1 ; v1(1580,3710) U5_COL1.1@1606.06,3683.94 ; v1(1580,3990) U4_COL1.1@1606.06,3963.94 ; v1(1580,4270) U3_COL1.1@1606.06,4243.94 ; v1(1580,4530) U2_COL1.1@1606.06,4503.94 ; U1_COL2.1@1755.83,3816.06 1779.76,3840 v1@1845,3840 ; U5_COL2.1 1763.39,4881.06 1787.33,4905 v1@1850,4905 ; U2_COL2.1@1765.83,4106.06 1789.76,4130 v1@1855,4130 ; U3_COL2.1@1765.83,4366.06 1789.76,4390 v1@1855,4390 ; U4_COL2.1@1770.83,4626.06 1794.76,4650 v1@1860,4650 ; v1(2071,4840.21) 2070,4839.21 2115.55,4793.65 2236.35,4793.65 v1(2240,4790) ; v1(2240,3710) U5_COL3.1@2266.06,3683.94 ; v1(2240,3990) U4_COL3.1@2266.06,3963.94 ; v1(2240,4270) U3_COL3.1@2266.06,4243.94 ; v1(2240,4530) U2_COL3.1@2266.06,4503.94 ; U1_COL4.1@2415.83,3816.06 2439.76,3840 v1@2505,3840 ; U5_COL4.1 2444.76,4905 v1@2510,4905 ; U2_COL4.1@2425.83,4106.06 2449.76,4130 v1@2515,4130 ; U3_COL4.1@2425.83,4366.06 2449.76,4390 v1@2515,4390 ; U4_COL4.1@2430.83,4626.06 2454.76,4650 v1@2520,4650
  Bottom Layer w10: 1150.44,4822.1 C7_COL0.1@1159.17,4830.83 ; v1(1170,3570) 1160,3570 1160,3687.26 1150.44,3696.82 1150.44,3757.1 1182.87,3789.53 1185,3789.53 C3_COL0.1@1185,3794.53 ; v1(1185,3835) C3_COL0.1@1185,3794.53 ; v1(1185,4900) 1190,4905 1190,4890 1190,4900 1190,4854.53 ; C4_COL0.1@1185.47,4070 1150.44,4070 ; C3_COL0.1 C3_COL0.1@1185,3794.53 ; C4_COL0.1@1195,4079.53 1195,4125 v1(1195,4115) ; C5_COL0.1@1195,4339.53 1195,4385 v1(1195,4375) ; C6_COL0.1@1199.53,4605 1150.44,4605 ; C6_COL0.1@1200,4599.53 1200,4645 v1(1200,4635) ; C5_COL0.1@1209.53,4335 1150.44,4335 ; v1(1415,4840) 1344.53,4840 1330,4854.53 1190,4854.53 ; C7_COL1.1@1520,4790 1565,4745 v1@1565,4270 ; C3_COL1.1@1520.47,3710 1565,3710 1565,3955 ; C5_COL1.1@1525,4270 v1@1565,4270 ; C7_COL1.1@1527.13,4795.47 1776.79,4795.47 1810.44,4829.13 1824.6,4829.13 C7_COL2.1@1842.87,4847.4 ; C4_COL1.1@1530,3990 1565,3955 ; C6_COL1.1@1540.47,4530.47 1560,4550 ; 1810,3885.67 1810,3829.53 C3_COL2.1@1845,3794.53 ; 1810.44,3921.89 1810.44,4070 ; 1810.44,4822.1 1810.44,4605 ; 1812,3887.67 1812,3920.33 ; C7_COL2.1@1839.31,4850.96 1842.87,4854.53 C7_COL2.1 ; C3_COL2.1@1842.87,3789.53 1845,3789.53 C3_COL2.1@1845,3794.53 ; v1(1845,3835) C3_COL2.1@1845,3794.53 ; C4_COL2.1@1845.47,4070 1810.44,4070 ; C3_COL2.1 C3_COL2.1@1845,3794.53 ; v1(1850,4900) C7_COL2.1 ; C4_COL2.1@1855,4079.53 1855,4125 v1(1855,4115) ; C5_COL2.1@1855,4339.53 1855,4385 v1(1855,4375) ; C6_COL2.1@1859.53,4605 1810.44,4605 ; C6_COL2.1@1860,4599.53 1860,4645 v1(1860,4635) ; C5_COL2.1@1869.53,4335 1810.44,4335 ; v1(2071,4840.21) 2060.47,4850.73 2060.47,4854.53 C7_COL2.1 ; C3_COL3.1@2180,3710 v1(2240,3710) 2457.26,3710 2470.44,3696.82 ; C4_COL3.1@2180,3990 v1(2240,3990) ; C4_COL3.1 2189.53,3990.47 2225,3955 2225,4230 ; C5_COL3.1@2180,4270 v1(2240,4270) ; C5_COL3.1 2184.53,4270.47 2225,4230 ; C6_COL3.1@2180,4530 v1(2240,4530) ; C6_COL3.1 2200.47,4530.47 2225,4555 ; v1(2505,3835) C3_COL4.1@2505,3794.53 ; C4_COL4.1@2505.47,4070 2470.44,4070 ; C3_COL4.1 C3_COL4.1@2505,3794.53 ; v1(2510,4900) C7_COL4.1 2502.87,4854.53 2470.44,4822.1 2470.44,4820 ; C4_COL4.1@2515,4079.53 2515,4125 v1(2515,4115) ; C5_COL4.1@2515,4339.53 2515,4385 v1(2515,4375) ; C6_COL4.1@2519.53,4605 2470.44,4605 ; v1(2520,3550) 2520,3647.26 2470.44,3696.82 ; C6_COL4.1@2520,4599.53 2520,4645 v1(2520,4635) ; C5_COL4.1@2529.53,4335 2470.44,4335 ; 1150.44,4070 1150.44,4335 ; 1150.44,4070 1150.44,3921.89 1152,3920.33 1152,3887.67 1150,3885.67 1150,3829.53 C3_COL0.1@1185,3794.53 ; 1150.44,4335 1150.44,4605 ; 1150.44,4605 1150.44,4659.27 1140,4669.71 1140,4811.65 C7_COL0.1@1159.17,4830.83 ; C7_COL0.1@1159.17,4830.83 1182.87,4854.53 1190,4854.53 ; 1565,3955 v1@1565,4270 ; 1810.44,4070 1810.44,4335 ; 1810.44,4335 1810.44,4605 ; 2225,4230 2225,4555 ; 2225,4555 2225,4745 2180,4790 v1(2240,4790) 2270,4820 2470.44,4820 ; 2470.44,3696.82 2470.44,3757.1 2502.87,3789.53 2505,3789.53 C3_COL4.1@2505,3794.53 ; 2470.44,4070 2470.44,4335 ; 2470.44,4070 2470.44,3921.89 2472,3920.33 2472,3887.67 2470,3885.67 2470,3829.53 C3_COL4.1@2505,3794.53 ; 2470.44,4335 2470.44,4605 ; 2470.44,4605 2470.44,4820

## Keep-outs
Keep-Out Layer:
  the board outline again, w10